# EAGLE board VCO-v1 (EAGLE 6.5.0)

No outline drawn. Coordinates in mm, seen from the top.
Copper layers (1*16): Top 0.035mm / dielectric 1.5mm / Bottom 0.035mm
Design rules "default": minimum track width 10mil, minimum drill 24mil, track to track 8mil, track to pad 8mil, pad to pad 8mil, via to via 8mil, smd to smd 8mil, copper to edge 40mil, drill to drill 8mil, minimum pad ring 10mil, minimum via ring 8mil, stop-mask expansion 4mil, vias tented up to drill 0mil, thermal gap 10mil

## Placement (x,y rotation side)
E$1  [TOGGLE_SWITCH_TAYDA]  12.7,73.03 90 top
E$2  [POTENTIOMETER_TAYDA_6MM]  12.7,152.4 0 top
E$3  [POTENTIOMETER_TAYDA_6MM]  12.7,123.19 0 top
E$4  [3.5MM_JACK_TAYDA]  12.7,83.82 90 top
E$5  [3.5MM_JACK_TAYDA]  12.7,99.06 90 top
E$6  [4U_1]  0,0 0 top
E$7  [3.5MM_JACK_TAYDA]  12.7,16.51 90 top
E$8  [3.5MM_JACK_TAYDA]  12.7,46.99 90 top
E$9  [3.5MM_JACK_TAYDA]  12.7,31.75 90 top
E$11  [3.5MM_JACK_TAYDA]  12.7,62.23 90 top

## Library data of the parts
E$1-E$9 E$11 = !synth_panel

## Text on the board
PanelText: CV-A Coarse | CV-A Fine | CV-A | CV-B | Ramp | Square | Triangle | Sine | VCO-v1